# EAGLE board Thetis_RevF1_PCB (EAGLE 9.7.0)
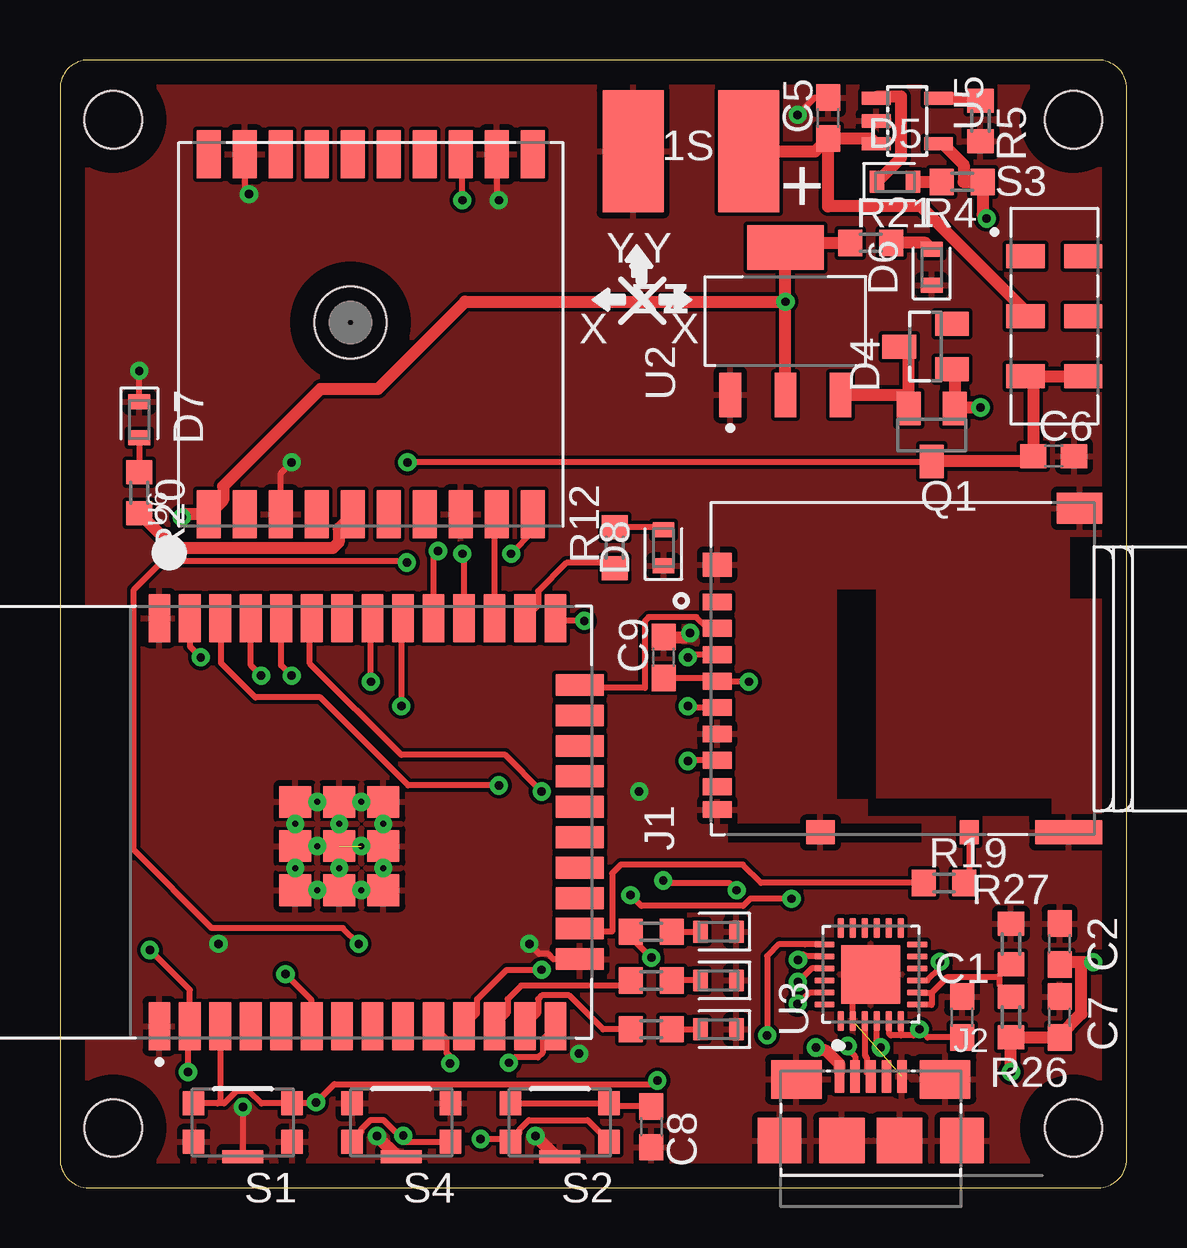
[diagram p0: board, top side]
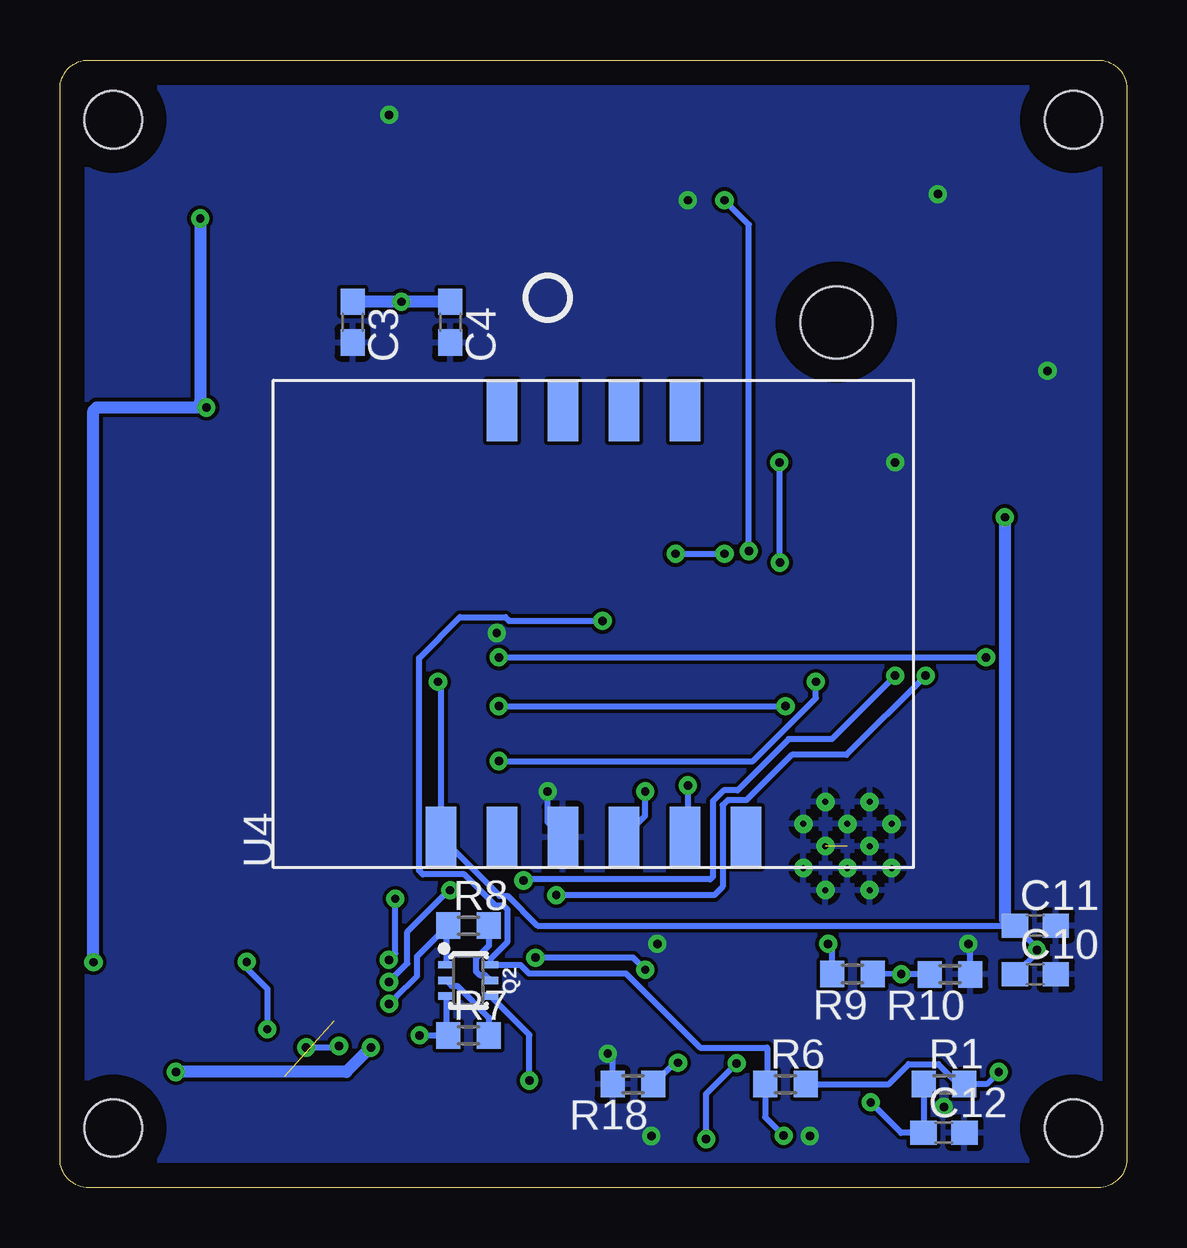
[diagram p1: board, bottom side, seen from below]

Size 44.45 x 46.99 mm. Coordinates in mm from the lower left corner, seen from the top.
Outline: 44.45,1.19 44.45,45.8 arc90 43.26,46.99 1.19,46.99 arc90 0,45.8 0,1.19 arc90 1.19,0 43.26,0 arc90 44.45,1.19
Copper layers (1*16): Top 0.035mm / dielectric 1.5mm / Bottom 0.035mm
Design rules "default": minimum track width 6mil, minimum drill 0.35mm, track to track 6mil, track to pad 6mil, pad to pad 6mil, via to via 6mil, smd to smd 6mil, copper to edge 40mil, drill to drill 6mil, minimum pad ring 10mil, minimum via ring 8mil, stop-mask expansion 4mil, vias tented up to drill 0mil, thermal gap 10mil
Net classes: 0 default: width 0.178 mm
Holes 2.39 mm at 2.22,2.49 2.22,44.5 42.23,44.5 42.23,2.49
tKeepout: area -0.2,42.1 to 4.6,46.9; area 39.8,42.1 to 44.6,46.9; area 39.8,0.1 to 44.6,4.9; area -0.2,0.1 to 4.6,4.9
bKeepout: area 39.8,42.1 to 44.6,46.9; area -0.2,42.1 to 4.6,46.9; area 39.8,0.1 to 44.6,4.9; area -0.2,0.1 to 4.6,4.9

## Footprints (pad centres in the part's own frame; a part is rotated, then mirrored left to right if it is on the bottom)
C0603 = smd 1.1 x 1: 1 -0.85,0; 2 0.85,0
LEDC1608X65N = smd 0.612 x 0.912: A 0.75,0; C -0.75,0
SOT23 = smd 1 x 1.4: 1 -0.95,-1.1; 2 0.95,-1.1; 3 0,1.1
LEDC1608X35N = smd 0.612 x 0.912: A 0.75,0; C -0.75,0
HRS_DM3AT-SF-PEJM5 = smd 0.7 x 1.2: 1 3.2,0; 2 2.1,0; 3 1,0; 4 -0.1,0; 5 -1.2,0; 6 -2.3,0; 7 -3.4,0; 8 -4.5,0; SWB -5.45,0 | smd 1 x 1.2: P1 -6.4,-4.3; P4 4.75,0 | smd 1 x 2.8: P2 -6.4,-14.65 | smd 1.3 x 1.9: P3 7.1,-15.1 | smd 1 x 0.8: SWA -6.4,-10.5
AMPHENOL_10118192-0001LF = smd 0.4 x 1.35: 1 -1.3,0; 2 -0.65,0; 3 0,0; 4 0.65,0; 5 1.3,0 | smd 2.1 x 1.6: SH1 -3.1,-0.125; SH2 3.1,-0.125 | smd 1.8 x 1.9: SH3 -3.8,-2.675; SH6 3.8,-2.675 | smd 1.9 x 1.9: SH4 -1.2,-2.675; SH5 1.2,-2.675
SMD2,54-5,08 = smd 2.54 x 5.08: 1 0,0
SC70-6 = smd 0.3 x 0.66: 1 -0.65,-0.92; 2 0,-0.92; 3 0.65,-0.92; 4 0.65,0.92; 5 0,0.92; 6 -0.65,0.92
R0603 = smd 1 x 1.1: 1 -0.85,0; 2 0.85,0
SW_KMR221GLFS = smd 0.9 x 1: 1 -2.05,0.8; 2 -2.05,-0.8; 3 2.05,-0.8; 4 2.05,0.8 | smd 1.7 x 0.55: 5 0,1.425
SW_JS202011JCQN = smd 1.6 x 1: 1 -1.2,2.5; 2 -1.2,0; 3 -1.2,-2.5; 4 1.2,2.5; 5 1.2,0; 6 1.2,-2.5
MODULE_ESP32-WROOM-32E_(16MB) = smd 2 x 0.9: 1 -8.5,5.26; 2 -8.5,3.99; 3 -8.5,2.72; 4 -8.5,1.45; 5 -8.5,0.18; 6 -8.5,-1.09; 7 -8.5,-2.36; 8 -8.5,-3.63; 9 -8.5,-4.9; 10 -8.5,-6.17; 11 -8.5,-7.44; 12 -8.5,-8.71; 13 -8.5,-9.98; 14 -8.5,-11.25; 25 8.5,-11.25; 26 8.5,-9.98; 27 8.5,-8.71; 28 8.5,-7.44; 29 8.5,-6.17; 30 8.5,-4.9; 31 8.5,-3.63; 32 8.5,-2.36; 33 8.5,-1.09; 34 8.5,0.18; 35 8.5,1.45; 36 8.5,2.72; 37 8.5,3.99; 38 8.5,5.26 | smd 0.9 x 2: 15 -5.715,-12.25; 16 -4.445,-12.25; 17 -3.175,-12.25; 18 -1.905,-12.25; 19 -0.635,-12.25; 20 0.635,-12.25; 21 1.905,-12.25; 22 3.175,-12.25; 23 4.445,-12.25; 24 5.715,-12.25 | smd 1.33 x 1.33: 39_1 -2.835,-0.405; 39_2 -1,-0.405; 39_3 0.835,-0.405; 39_4 -2.835,-2.24; 39_5 -1,-2.24; 39_6 0.835,-2.24; 39_7 -2.835,-4.075; 39_8 -1,-4.075; 39_9 0.835,-4.075 | drill 0.25 pad 0.3: 39_10 -1.917,-0.405; 39_11 -0.083,-0.405; 39_12 -2.835,-1.323; 39_13 -1,-1.323; 39_14 0.835,-1.323; 39_15 -1.917,-2.24; 39_16 -0.083,-2.24; 39_17 -2.835,-3.158; 39_18 -1,-3.158; 39_19 0.835,-3.158; 39_20 -1.917,-4.075; 39_21 -0.083,-4.075
SOT230P700X180-4N = smd 1.86 x 0.9: 1 -3.075,2.3; 2 -3.075,0; 3 -3.075,-2.3 | smd 1.86 x 3.19: 4 3.075,0
QFN50P400X400X80-25N = smd 0.84 x 0.26: 1 -1.935,1.25; 2 -1.935,0.75; 3 -1.935,0.25; 4 -1.935,-0.25; 5 -1.935,-0.75; 6 -1.935,-1.25; 13 1.935,-1.25; 14 1.935,-0.75; 15 1.935,-0.25; 16 1.935,0.25; 17 1.935,0.75; 18 1.935,1.25 | smd 0.26 x 0.84: 7 -1.25,-1.935; 8 -0.75,-1.935; 9 -0.25,-1.935; 10 0.25,-1.935; 11 0.75,-1.935; 12 1.25,-1.935; 19 1.25,1.935; 20 0.75,1.935; 21 0.25,1.935; 22 -0.25,1.935; 23 -0.75,1.935; 24 -1.25,1.935 | smd 2.45 x 2.45: 25 0,0
ADAFRUIT-BNO055-BREAKOUT-SMD = smd 2.54 x 1.27: P$1 -8.89,6.35; P$2 -8.89,3.81; P$3 -8.89,1.27; P$4 -8.89,-1.27; P$5 -8.89,-3.81; P$6 -8.89,-6.35; P$7 8.89,3.81; P$8 8.89,1.27; P$9 8.89,-1.27; P$10 8.89,-3.81
SOT23-5L = smd 0.55 x 1.2: 1 -0.95,-1.3; 2 0,-1.3; 3 0.95,-1.3; 4 0.95,1.3; 5 -0.95,1.3
FGPMMOPA6H = smd 2 x 1: P$1 -7.5,6.75; P$2 -7.5,5.25; P$3 -7.5,3.75; P$4 -7.5,2.25; P$5 -7.5,0.75; P$6 -7.5,-0.75; P$7 -7.5,-2.25; P$8 -7.5,-3.75; P$9 -7.5,-5.25; P$10 -7.5,-6.75; P$11 7.5,-6.75; P$12 7.5,-5.25; P$13 7.5,-3.75; P$14 7.5,-2.25; P$15 7.5,-0.75; P$16 7.5,0.75; P$17 7.5,2.25; P$18 7.5,3.75; P$19 7.5,5.25; P$20 7.5,6.75 | hole 3: 0.5,0.85

## Placement (x,y rotation side)
C1  1 uF  [C0603]  37.59,7.11 90 top
C2  1 uF  [C0603]  41.66,10.16 90 top
C3  10 uF  [C0603]  32.26,36.07 270 bottom
C4  10 uF  [C0603]  28.19,36.07 270 bottom
C5  10 uF  [C0603]  32,44.57 90 top
C6  10 uF  [C0603]  41.4,30.48 0 top
C7  1 uF  [C0603]  41.66,7.11 90 top
C8  1 uF  [C0603]  24.64,2.54 270 top
C9  1 uF  [C0603]  25.15,22.1 90 top
C10  1 uF  [C0603]  3.81,8.89 0 bottom
C11  1 uF  [C0603]  3.81,10.92 0 bottom
C12  10 uF  [C0603]  7.62,2.29 0 bottom
D1  GRN  [LEDC1608X65N]  27.43,10.67 180 top
D2  GRN  [LEDC1608X65N]  27.43,8.64 180 top
D3  GRN  [LEDC1608X65N]  27.43,6.6 180 top
D4  BAT400  [SOT23]  36.07,35.05 90 top
D5  ORG  [LEDC1608X65N]  34.8,41.91 0 top
D6  RED  [LEDC1608X65N]  36.32,38.35 90 top
D7  RED  [LEDC1608X35N]  3.3,32 270 top
D8  GRN  [LEDC1608X65N]  25.15,26.67 90 top
J1  DM3AT-SF-PEJM5  [HRS_DM3AT-SF-PEJM5]  27.38,21.21 90 top
J2  10118192-0001LF  [AMPHENOL_10118192-0001LF]  33.78,4.64 0 top
PAD1  Batt+  [SMD2,54-5,08]  28.7,43.18 0 top
PAD2  Batt-  [SMD2,54-5,08]  23.88,43.18 0 top
Q1  DMG3414U-7  [SOT23]  36.32,31.37 180 top
Q2  MMBT2222N  [SC70-6]  27.43,8.64 270 bottom
R1  10k  [R0603]  7.62,4.32 0 bottom
R2  1k  [R0603]  24.64,8.64 0 top
R3  1k  [R0603]  24.64,10.67 0 top
R4  1k  [R0603]  37.59,41.91 180 top
R5  10k  [R0603]  38.35,44.45 270 top
R6  10k  [R0603]  14.22,4.32 0 bottom
R7  10k  [R0603]  27.43,6.35 0 bottom
R8  10k  [R0603]  27.43,10.92 0 bottom
R9  10k  [R0603]  11.43,8.91 180 bottom
R10  10k  [R0603]  7.37,8.89 180 bottom
R11  1k  [R0603]  24.64,6.6 0 top
R12  1k  [R0603]  23.11,26.67 90 top
R18  10k  [R0603]  20.57,4.32 180 bottom
R19  10k  [R0603]  36.83,12.7 0 top
R20  1k  [R0603]  3.3,28.96 270 top
R21  1k  [R0603]  33.78,39.37 0 top
R26  22.1k  [R0603]  39.62,7.11 270 top
R27  47.5k  [R0603]  39.62,10.16 270 top
S1  KMR221GLFS  [SW_KMR221GLFS]  7.62,2.72 180 top
S2  KMR221GLFS  [SW_KMR221GLFS]  20.83,2.72 180 top
S3  JS202011JCQN  [SW_JS202011JCQN]  41.43,36.32 0 top
S4  KMR221GLFS  [SW_KMR221GLFS]  14.22,2.72 180 top
U1  ESP32-WROOM-32E_(16MB)  [MODULE_ESP32-WROOM-32E_(16MB)]  9.4,15.24 90 top
U2  AZ1117H-3.3TRE1  [SOT230P700X180-4N]  30.23,36.11 90 top
U3  CP2102N-A02-GQFN24R  [QFN50P400X400X80-25N]  33.78,8.89 90 top
U4  BNO055 Breakout  [ADAFRUIT-BNO055-BREAKOUT-SMD]  22.23,23.5 90 bottom
U5  MCP73831/OT  [SOT23-5L]  35.31,44.45 270 top
U6  [FGPMMOPA6H]  12.95,35.56 90 top

## Library data of the parts
C1-C12 = rcl; SPICEPREFIX: C
D1-D3 D5 D6 D8 = LED; CATEGORY: LED; COLOR: GREEN; DESCRIPTION: CHIP LED ROUND; SUB-CATEGORY: CHIP; TYPE: ROUND_TOP
D4 = diode
D7 = LED; CATEGORY: LED; COLOR: YELLOW; DESCRIPTION: CHIP LED FLAT; SUB-CATEGORY: CHIP; TYPE: FLAT_TOP
J1 = DM3AT-SF-PEJM5; AVAILABILITY: Unavailable; DESCRIPTION: DM3 RA SMT microSD memory card push/push; MF: Hirose; MP: DM3AT-SF-PEJM5; PACKAGE: None; PRICE: None
J2 = MicroUSB; MANUFACTURER: Amphenol; PARTREV: B; STANDARD: Manufacturer Recommendation
PAD1 PAD2 = wirepad
Q1 = Transistor; CATEGORY: Transistor; SUB-CATEGORY: MOSFET; TYPE: N-Channel
Q2 = SparkFun-DiscreteSemi-Poseidon-Edit; PROD_ID: TRANS-13337
R1-R12 R18-R21 R26 R27 = rcl; SPICEPREFIX: R
S1 S2 S4 = KMR221GLFS; MANUFACTURER: CnK
S3 = JS202011SCQN
U1 = ESP32-WROOM-32E; MANUFACTURER: Espressif Systems; MAXIMUM_PACKAGE_HEIGHT: 3.25mm; PARTREV: 1.1; STANDARD: Manufacturer Recommendations
U2 = AZ1117EH-5.0TRG1; ARROW_ELECTRONICS-PURCHASE-URL: https://snapeda.com/shop?store=Arrow+Electronics&id=482930; AVAILABILITY: Good; DESCRIPTION: Linear Voltage Regulator IC 1 Output 1A SOT-223; DIGIKEY-PURCHASE-URL: https://snapeda.com/shop?store=DigiKey&id=482930; MF: Diodes Inc.; MOUSER-PURCHASE-URL: https://snapeda.com/shop?store=Mouser&id=482930; MP: AZ1117EH-5.0TRG1; PACKAGE: SOT-223 Diodes Inc.; PRICE: None
U3 = CP2102N-A02-GQFN24R; A_MAX: 0.8; B_MAX: 0.3; B_MIN: 0.18; B_NOM: 0.24; D2_NOM: 2.45; D_MAX: 4.0; D_MIN: 4.0; D_NOM: 4.0; E2_NOM: 2.45; ENOM: 0.5; E_MAX: 4.0; E_MIN: 4.0; E_NOM: 4.0; L_MAX: 0.5; L_MIN: 0.3; L_NOM: 0.4; MANUFACTURER: Silicon Labs; PARTREV: 1.3; PIN_COUNT_D: 6.0; PIN_COUNT_E: 6.0; STANDARD: IPC 7351B
U4 = EVE-ECAD-Library
U5 U6 = adafruit - EVE Edit

## Nets
3.3V: C3.1 C4.1 C9.1 C10.1 C11.1 J1.4 R1.2 R6.2 R21.1 U1.2 U2.2 U2.4 U4.P$1 U6.P$1
3V3: U4.P$2
!DTR: Q2.1 R8.1 U3.23
!RTS: Q2.3 R7.1 U3.19
ACAL_LED: R2.1 U1.12
BATT_MON: R9.1 R10.2 U1.6
D+: J2.3 U3.3
D-: J2.2 U3.4
ESP_RX0: U1.34 U3.21
ESP_RX1: U1.27 U6.P$9
ESP_TX0: U1.35 U3.20
ESP_TX1: U1.28 U6.P$10
GCAL_LED: R3.1 U1.11
GND: C1.2 C2.2 C3.2 C4.2 C5.2 C6.2 C7.2 C8.2 C9.2 C10.2 C11.2 C12.2 D1.C D2.C D3.C D6.C D7.C D8.C J1.6 J1.P1 J1.P2 J1.P3 J1.P4 J1.SWB J2.5 J2.SH1 J2.SH2 J2.SH3 J2.SH4 J2.SH5 J2.SH6 PAD2.1 R5.2 R10.1 R18.2 R27.1 S1.1 S1.4 S1.5 S2.5 S4.2 S4.3 S4.5 U1.1 U1.15 U1.38 U1.39_1 U1.39_2 U1.39_3 U1.39_4 U1.39_5 U1.39_6 U1.39_7 U1.39_8 U1.39_9 U1.39_10 U1.39_11 U1.39_12 U1.39_13 U1.39_14 U1.39_15 U1.39_16 U1.39_17 U1.39_18 U1.39_19 U1.39_20 U1.39_21 U2.1 U3.2 U3.25 U4.P$3 U5.2 U6.P$3 U6.P$8 U6.P$12 U6.P$19
GPS_PPS: U1.29 U6.P$13
IO0: Q2.6 R6.1 S4.1 S4.4 U1.25
LOG_LED: R12.1 U1.26
LOG_SELECT: S2.1 S2.4 U1.10
MCAL_LED: R11.1 U1.13
MISO: J1.7 U1.31
MOSI: J1.3 U1.37
N$1: C5.1 PAD1.1 S3.2 U5.3
N$2: D7.A R20.1
N$3: R20.2 U6.P$5
N$5: R18.1 U1.14
N$7: Q2.5 R8.2
N$8: D1.A R3.2
N$9: Q2.2 R7.2
N$10: C8.1 S2.2 S2.3
N$11: D2.A R2.2
N$13: D4.3 Q1.2 U2.3
N$14: D3.A R11.2
N$16: D8.A R12.2
N$18: C1.1 U3.5 U3.6 U3.9
N$19: R26.1 R27.2 U3.7 U3.8
N$20: D5.A R4.2
N$21: D5.C U5.1
N$22: R5.1 U5.5
N$23: J1.SWA R19.2
N$24: D6.A R21.2
RST: C12.1 Q2.4 R1.1 S1.2 S1.3 U1.3
SCK: J1.5 U1.30
SCL: U1.36 U4.P$5
SD_CD: R19.1 U1.16
SD_CS: J1.2 U1.24
SDA: U1.33 U4.P$4
V_BATT: C6.1 Q1.3 R9.2 S3.3 S3.6
V_USB: C2.1 C7.1 D4.1 J2.1 Q1.1 R4.1 R26.2 U5.4

## Tracks (layer width: path | path; a pad name or v marks a point on that pad's centre or on a via)
3.3V  (via drill 0.35)
  Top 0.254: v5.33,4.83 5.33,6.67 U1.2 5.41,8.25 v3.75,9.91 | C9.1 27.25,21.25 J1.4 27.41,21.08 v28.7,21.08
  Top 0.508: U2.2 v30.23,36.92 | v30.23,36.92 U2.4 30.41,39.37 R21.1 | v30.23,36.92 16.88,36.92 13.25,33.29 10.86,33.29 6.8,29.23 6.8,28.65 U6.P$1 5.2,28.06 v5.08,27.94
  Bottom 0.254: 3.64,10.01 3.75,10.01 C11.1 4.83,10.92 24.56,10.92 25.8,12.16 26.13,12.16 U4.P$1 28.57,20.95 v28.7,21.08 | 3.64,10.01 3.64,9.91 C10.1 | v5.33,4.83 5.84,4.32 R1.2 7.03,4.32 7.85,5.15 9.09,5.15 9.91,4.32 R6.2 | v3.75,9.91 3.64,10.01
  Bottom 0.508: C4.1 v30.23,36.92 C3.1 | v5.08,27.94 5.08,11.18 4.83,10.92
!DTR  (via drill 0.35)
  Top 0.254: U3.23 31.84,8.13 31.23,8.13 31.02,7.92 30.98,7.92 v30.73,7.67
  Bottom 0.254: R8.1 28.35,10.85 | 28.35,10.85 Q2.1 | v30.73,7.67 30.48,7.92 30.47,7.92 29.57,8.82 29.57,9.64 28.35,10.85
!RTS  (via drill 0.35)
  Top 0.254: v29.46,6.35 29.46,9.65 29.97,10.16 29.98,10.16 31.02,10.16 31.04,10.14 U3.19
  Bottom 0.254: Q2.3 28.35,6.42 | 28.35,6.42 R7.1 | v29.46,6.35 28.42,6.35 28.35,6.42
ACAL_LED
  Top 0.254: U1.12 18.65,7.28 18.65,7.86 19.22,8.43 23.58,8.43 R2.1
BATT_MON  (via drill 0.35)
  Top 0.254: U1.6 10.49,7.81 v9.4,8.9
  Bottom 0.254: R10.2 v9.4,8.9 R9.1
D+
  Top 0.254: J2.3 33.61,4.81 33.61,5.43 33.54,5.5 33.54,5.64 33.53,5.65 U3.3
D-  (via drill 0.35)
  Top 0.254: J2.2 33.13,5.48 32.83,5.78 v32.83,5.91 | U3.4 34.03,6.01 v34.2,5.85
  Bottom 0.254: v34.2,5.85 32.89,5.85 v32.83,5.91
ESP_RX0  (via drill 0.35)
  Top 0.254: U3.21 31.32,9.14 31.01,8.82 31,8.82 v30.75,8.57 | U1.34 9.22,21.77 v9.65,21.34 | v25.14,12.8 25.18,12.8 25.29,12.7 27.89,12.7 v28.19,12.4
  Bottom 0.254: v30.75,8.57 29.97,9.35 29.97,10.68 28.25,12.4 v28.19,12.4 | v9.65,21.34 12.29,18.69 14.09,18.69 16.22,16.56 16.79,16.56 17.25,16.11 17.25,12.96 17.36,12.85 25.09,12.85 v25.14,12.8
ESP_RX1
  Top 0.254: U1.27 18.11,27.96 U6.P$9
ESP_TX0  (via drill 0.35)
  Top 0.254: U3.20 31.08,9.64 31.02,9.71 30.96,9.71 v30.75,9.5 | U1.35 7.95,21.77 v8.38,21.34 | v30.48,12.04 28.77,12.04 28.47,11.74 24.22,11.74 v23.77,12.19
  Bottom 0.254: v30.75,9.5 30.48,9.77 v30.48,12.04 | v8.38,21.34 11.68,18.03 13.97,18.03 15.85,16.15 16.63,16.15 16.84,15.94 16.84,12.54 17.19,12.19 v23.77,12.19
ESP_TX1  (via drill 0.35)
  Top 0.254: U6.P$10 19.7,27.32 v18.8,26.42 | v16.76,26.42 16.84,26.34 U1.28
  Bottom 0.254: v18.8,26.42 v16.76,26.42
GCAL_LED  (via drill 0.35)
  Top 0.254: U1.11 17.38,7.28 17.38,7.86 18.61,9.08 v20.07,9.08 | R3.1 23.79,10.44 v24.64,9.59
  Bottom 0.254: v20.07,9.08 20.57,9.59 v24.64,9.59
GND  (via drill 0.35)  (2 unrouted)
  Top 0.254: U3.2 33.03,8.62 33.02,8.64 33.27,8.89 U3.25 | U1.39_1 U1.39_12 | U6.P$3 9.2,29.78 v9.65,30.23 | D7.C v3.3,34.04 | U6.P$19 7.7,41.57 v7.87,41.4 | U6.P$12 18.2,41.23 v18.29,41.15 | U1.15 20.55,9.53 20.34,9.74 19.98,9.74 v19.56,10.16 | C5.2 31.45,45.42 v30.73,44.7 | v7.62,3.37 S1.5
  Top 0.508: S2.5 20.68,1.29 v19.81,2.16 | S4.5 14.07,1.29 v13.21,2.16 | C9.2 26.09,22.95 v26.25,23.11
  Bottom 0.254: R10.1 6.52,10.07 v6.6,10.16 | U4.P$3 24.13,15.24 v24.13,16.51 | R18.2 21.42,5.38 v21.63,5.59
  pour Top: -1.4,-1.14 46.86,-1.14 46.86,47.88 -1.4,47.88
  pour Bottom: -1.4,-1.14 46.86,-1.14 46.86,47.88 -1.4,47.88
GPS_PPS  (via drill 0.35)
  Top 0.254: U1.29 15.57,26.35 v15.75,26.53 | v16.76,41.15 16.76,43 U6.P$13
  Bottom 0.254: v15.75,26.53 15.75,40.13 v16.76,41.15
IO0  (via drill 0.35)
  Top 0.254: 14.22,2.1 14.4,1.92 S4.1 | v21.84,23.62 20.77,23.62 U1.25 | v14.3,2.17 14.22,2.1 | S4.4 12.55,2.29 12.55,2.43 12.94,2.81 13.48,2.81 14.2,2.1 14.22,2.1
  Bottom 0.254: v21.84,23.62 25.74,23.62 25.89,23.77 27.79,23.77 29.49,22.07 29.49,13.22 29.33,13.06 27.6,13.06 26.3,11.75 25.97,11.75 25.8,11.59 25.8,10.26 26.51,9.55 Q2.6 25.27,9.29 24.91,8.93 20.87,8.93 17.78,5.84 14.99,5.84 14.99,4.41 R6.1 15.07,2.95 v14.3,2.17
LOG_LED
  Top 0.254: U1.26 19.92,24.28 19.92,24.86 21.1,26.04 22.9,26.04 R12.1
LOG_SELECT  (via drill 0.35)
  Top 0.254: U1.10 16.11,6.2 16.11,5.62 16.26,5.48 v16.26,5.18 | v17.53,2.03 18.54,2.03 18.72,1.86 S2.4 19.15,2.29 19.15,2.43 19.54,2.81 21.98,2.81 S2.1
  Bottom 0.254: v17.53,2.03 17.53,3.91 v16.26,5.18
MCAL_LED
  Top 0.254: R11.1 22.63,6.6 21.21,8.02 20.08,8.02 19.92,7.86 19.92,7.28 U1.13
MISO  (via drill 0.35)
  Top 0.254: J1.7 26.19,17.81 v26.16,17.78 | v12.95,21.08 12.95,23.67 U1.31
  Bottom 0.254: v26.16,17.78 15.58,17.78 12.95,20.41 v12.95,21.08
MOSI  (via drill 0.35)
  Top 0.254: J1.3 26.27,22.21 v26.16,22.1 | U1.37 5.41,22.55 v5.87,22.1
  Bottom 0.254: v26.16,22.1 v5.87,22.1
N$1
  Top 0.508: PAD1.1 31.46,43.18 C5.1 | C5.1 33.78,43.72 U5.3 | S3.2 40.23,36.53 35.87,40.89 32,40.89 C5.1
N$2
  Top 0.254: D7.A R20.1
N$3
  Top 0.508: U6.P$5 11.61,27.47 11.61,26.89 11.37,26.65 4.75,26.65 R20.2
N$5  (via drill 0.35)
  Top 0.254: U1.14 20.11,6.2 20.11,5.62 19.91,5.43 18.92,5.43 v18.7,5.21
  Bottom 0.254: v18.7,5.21 18.83,5.21 R18.1
N$7
  Bottom 0.254: Q2.5 26.73,8.86 26.96,8.86 27.12,9.02 27.12,9.55 26.58,10.09 R8.2
N$8
  Top 0.254: R3.2 D1.A
N$9
  Bottom 0.254: Q2.2 28.13,8.41 27.91,8.41 26.58,7.09 R7.2
N$10
  Top 0.254: S2.3 S2.2 23,3.39 C8.1
N$11
  Top 0.254: D2.A R2.2
N$13
  Top 0.508: Q1.2 35.37,33.02 | 35.37,33.02 35.37,34.65 D4.3 | U2.3 35.36,33.03 35.37,33.02
N$14
  Top 0.254: R11.2 D3.A
N$16
  Top 0.254: R12.2 25.15,27.52 D8.A
N$18  (via drill 0.35)
  Top 0.254: U3.5 34.54,6.94 34.54,6.43 34.62,6.35 35.05,6.35 | 35.05,6.35 35.05,6.93 U3.6 | U3.9 36.14,8.64 36.67,9.16 v36.67,9.41 | 35.05,6.35 35.56,6.35 v35.81,6.6 36.16,6.26 C1.1
  Bottom 0.254: v35.81,6.6 35.81,8.29 36.67,9.14 v36.67,9.41
N$19
  Top 0.254: U3.8 35.73,8.13 36.32,8.13 | 36.32,8.13 36.32,7.62 35.74,7.62 U3.7 | 36.32,8.13 36.81,8.62 36.81,8.63 36.98,8.79 39.1,8.79 39.16,8.85 | 39.16,8.85 R27.2 | R26.1 39.16,8.43 39.16,8.85
N$20
  Top 0.508: D5.A R4.2
N$21
  Top 0.508: D5.C 35.05,42.91 35.05,45.47 34.07,45.47 U5.1
N$22
  Top 0.508: U5.5 38.25,45.4 R5.1
N$23
  Top 0.254: R19.2 37.88,12.9 J1.SWA
N$24
  Top 0.508: R21.2 36.06,39.37 D6.A
RST  (via drill 0.35)
  Top 0.254: U1.3 6.68,3.63 6.56,3.52 | 6.56,3.52 S1.3 | v24.89,4.47 24.74,4.32 11.43,4.32 v10.67,3.56 10.63,3.52 S1.2 8.4,3.52 7.89,4.03 7.35,4.03 6.84,3.52 6.56,3.52
  Bottom 0.254: Q2.4 24.89,6.37 v24.89,4.47 | v10.67,3.56 9.4,2.29 C12.1 R1.1
SCK  (via drill 0.35)
  Top 0.254: J1.5 26.22,20.01 v26.16,20.07 | v14.22,20.07 14.22,23.67 U1.30
  Bottom 0.254: v26.16,20.07 v14.22,20.07
SCL  (via drill 0.35)
  Top 0.254: U1.36 6.71,23.71 6.71,21.86 8.14,20.43 10.85,20.43 14.51,16.76 v18.29,16.76
  Bottom 0.254: U4.P$5 18.29,14.73 v18.29,16.76
SD_CD
  Top 0.254: R19.1 29.21,12.7 28.45,13.46 23.37,13.46 23.01,13.1 23.01,10.67 21.77,10.67 U1.16
SD_CS
  Top 0.254: U1.24 21.77,20.83 24.37,20.83 24.37,23.61 24.53,23.78 26.52,23.78 26.99,23.31 J1.2
SDA  (via drill 0.35)
  Top 0.254: v20.07,16.51 18.54,18.03 14.22,18.03 10.41,21.84 10.41,23.67 U1.33
  Bottom 0.254: U4.P$4 20.07,15.49 v20.07,16.51
V_BATT  (via drill 0.35)
  Top 0.254: v14.45,26.05 14.38,26.12 4.28,26.12 3.08,24.92 3.08,14.07 6.33,10.82 11.79,10.82 v12.45,10.16 | v14.48,30.23 36.54,30.23 36.58,30.27
  Top 0.508: S3.6 S3.3 40.55,33.5 C6.1 40.34,30.27 36.58,30.27 Q1.3
  Bottom 0.254: R9.2 12.28,9.99 v12.45,10.16 | v14.45,26.05 14.45,30.2 v14.48,30.23
V_USB  (via drill 0.35)
  Top 0.254: J2.1 32.48,4.86 | Q1.1 37.32,32.51
  Top 0.508: U5.4 36.78,43.5 37.65,42.63 37.65,41.91 R4.1 38.44,40.55 v38.61,40.39 | D4.1 37.27,34 Q1.1 | v39.62,4.83 R26.2 C7.1 41.66,6.34 42.56,7.24 42.56,9.29 42.67,9.4 | 42.67,9.4 41.74,9.4 C2.1 | 42.67,9.4 v43.06,9.4 | 37.32,32.51 v38.35,32.51 | v31.5,5.85 31.62,5.72 31.9,5.72 32.48,5.14 32.48,4.86
  Bottom 0.508: v38.61,40.39 38.61,32.77 v38.35,32.51 42.93,32.51 43.06,32.38 v43.06,9.4 | v31.5,5.85 32.52,4.83 v39.62,4.83

## Text on the board
tSilk: 1S | + | Y | Y | Z | Z | X | X